# EAGLE board TouScruino-arm-ui2-v0 (EAGLE 6.3)
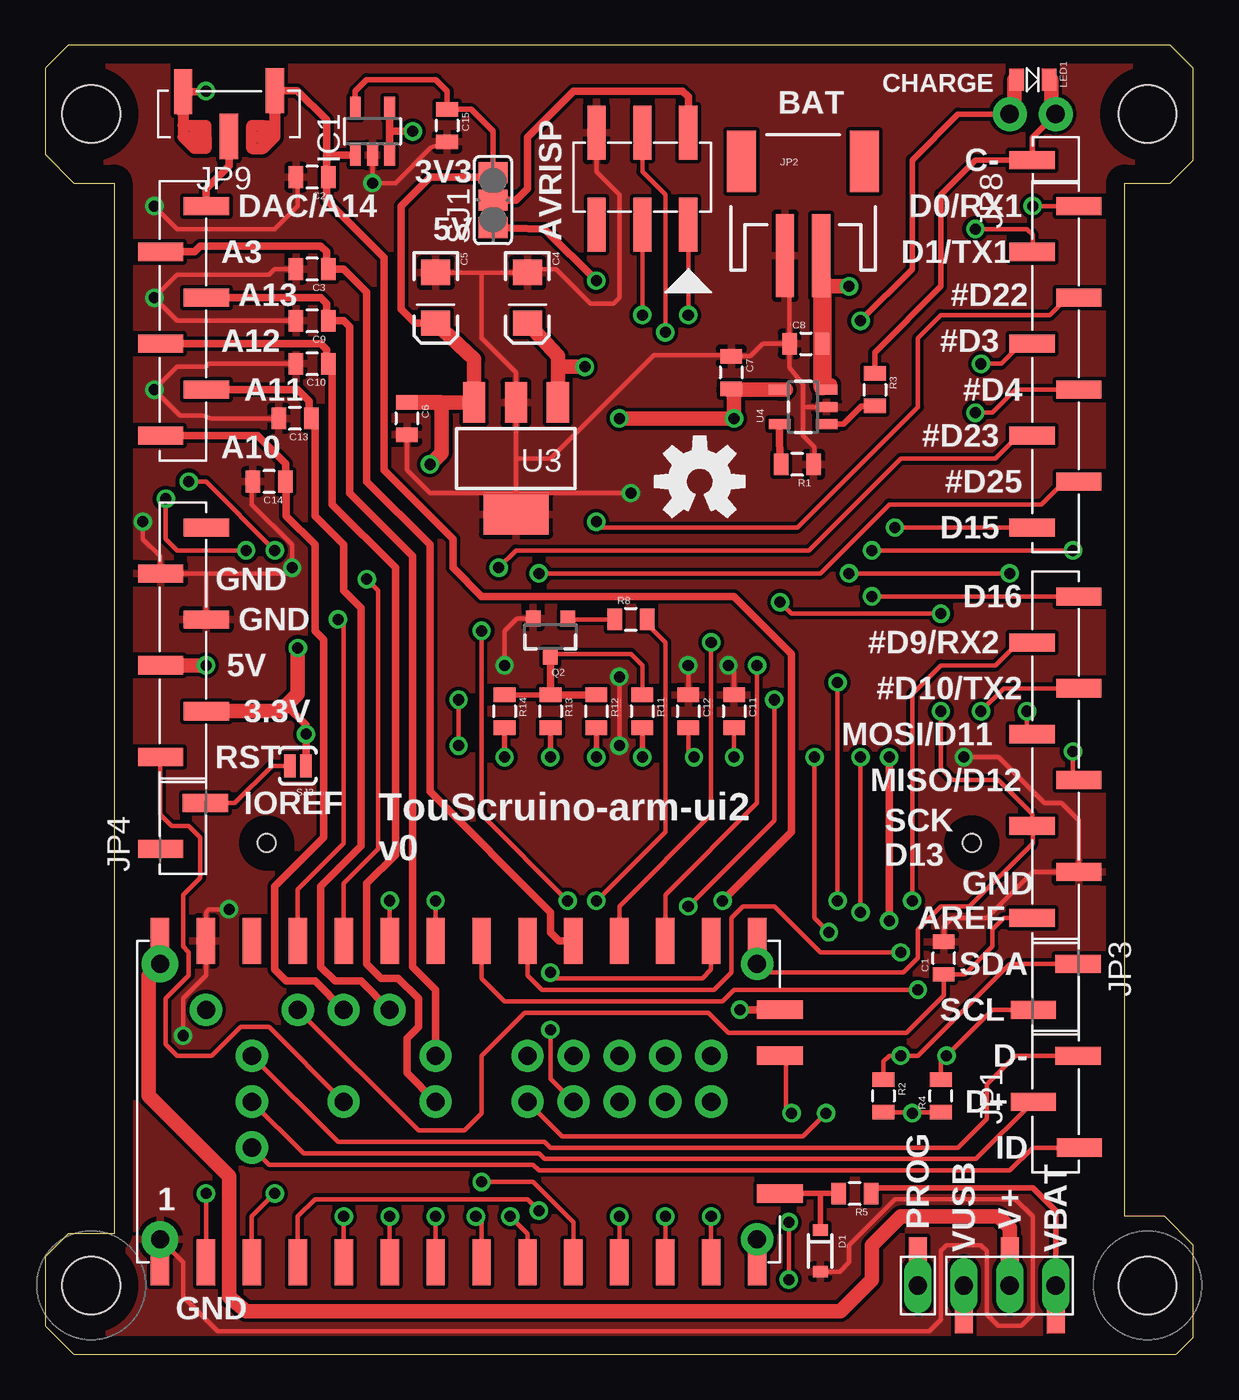
[diagram p0: board, top side]
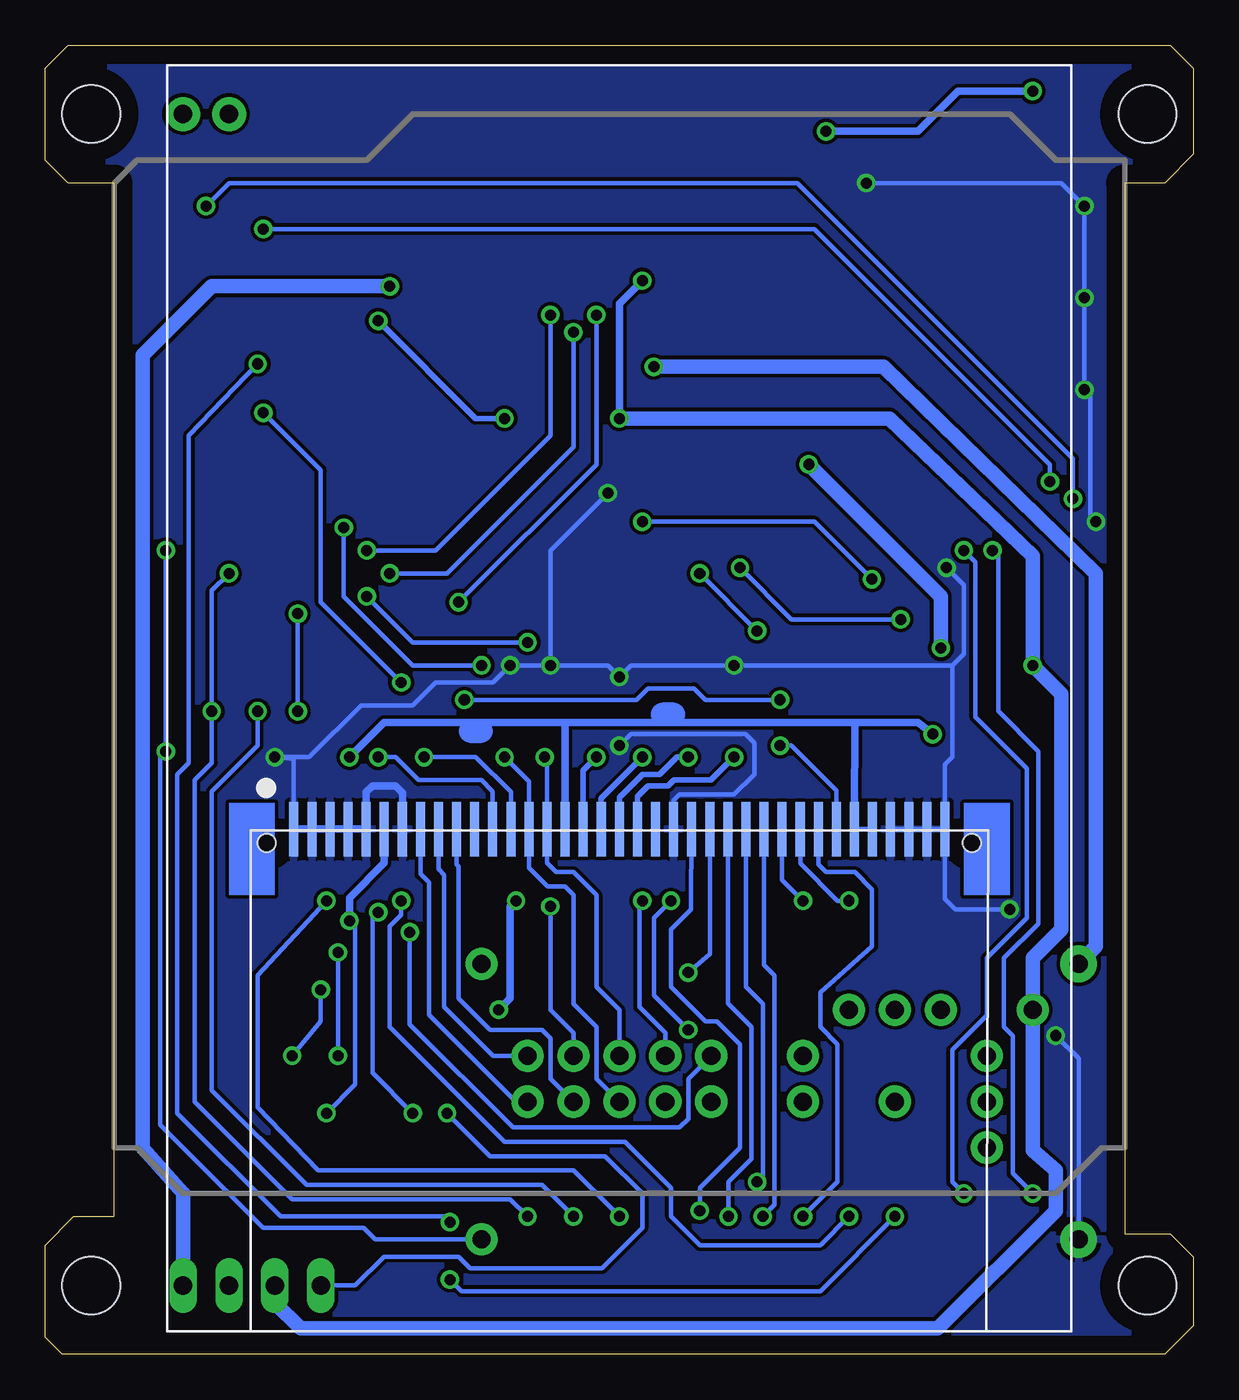
[diagram p1: board, bottom side, seen from below]

Size 63.5 x 72.39 mm. Coordinates in mm from the lower left corner, seen from the top.
Outline: 63.5,0.95 63.5,6.03 61.91,7.62 59.69,7.62 59.69,64.77 62.23,64.77 63.5,66.04 63.5,71.12 62.23,72.39 1.27,72.39 0,71.12 0,66.36 1.59,64.77 1.91,64.77 3.81,64.77 3.81,6.67 1.27,6.67 0,5.4 0,1.59 1.59,0 62.55,0 63.5,0.95
Copper layers (1*16): Top 0.035mm / dielectric 1.5mm / Bottom 0.035mm
Design rules "default *": minimum track width 10mil, minimum drill 24mil, track to track 8mil, track to pad 8mil, pad to pad 8mil, via to via 8mil, smd to smd 8mil, copper to edge 40mil, drill to drill 8mil, minimum pad ring 10mil, minimum via ring 8mil, stop-mask expansion 4mil, vias tented up to drill 0mil, thermal gap 10mil
Net classes: 0 default: width 0.203 mm; 1 vcc: width 0.254 mm; 2 signal: width 0.305 mm
Holes 3.2 mm at 2.54,68.58 60.96,68.58 2.54,3.81 60.96,3.81

## Footprints (pad centres in the part's own frame; a part is rotated, then mirrored left to right if it is on the bottom)
2X3_SMD = smd 3 x 1 bottom: 1 -2.62,2.54; 2 2.46,2.54; 3 -2.62,0; 4 2.46,0; 5 -2.62,-2.54; 6 2.46,-2.54
0805 = smd 0.8 x 1.2: 1 -0.9,0; 2 0.9,0
EIA3216 = smd 1.4 x 1.6: A 1.4,0; C -1.4,0
ILI9325_28INCH_TS = smd 0.5 x 3: 1 -18,27.77; 2 -17,27.77; 3 -16,27.77; 4 -15,27.77; 5 -14,27.77; 6 -13,27.77; 7 -12,27.77; 8 -11,27.77; 9 -10,27.77; 10 -9,27.77; 11 -8,27.77; 12 -7,27.77; 13 -6,27.77; 14 -5,27.77; 15 -4,27.77; 16 -3,27.77; 17 -2,27.77; 18 -1,27.77; 19 0,27.77; 20 1,27.77; 21 2,27.77; 22 3,27.77; 23 4,27.77; 24 5,27.77; 25 6,27.77; 26 7,27.77; 27 8,27.77; 28 9,27.77; 29 10,27.77; 30 11,27.77; 31 12,27.77; 32 13,27.77; 33 14,27.77; 34 15,27.77; 35 16,27.77; 36 17,27.77; 37 18,27.77 | hole 1: -19.5,27; 19.5,27
SOD-323 = smd 0.63 x 0.83: 1 -1.15,0; 2 1.15,0
SOT23-5 = smd 0.6 x 1.2: 1 -0.95,-1.306; 2 0,-1.306; 3 0.95,-1.306; 4 0.95,1.306; 5 -0.95,1.306
1X03_SMD_ALT = smd 1 x 2.5: 1 0,-1.24; 2 -2.54,1.24; 3 -5.08,-1.3
JST-2-SMD = smd 1 x 4.6: 1 -1,-3.7; 2 1,-3.7 | smd 1.6 x 3.4: NC1 -3.4,1.5; NC2 3.4,1.5
1X02_SMD_ALT = smd 1 x 2.5: 1 0,-1.24; 2 -2.54,1.24
1X03_SMD_TH = drill 1.016 pad 1.245 long: 1 0,0; 2 -2.54,0; 3 -5.08,0 | smd 1 x 2: 1A 0,1.651; 2A -2.54,-1.651; 3A -5.08,1.651
1X01_SMD_TH = drill 1.016 pad 1.245 long: 1 0,0 | smd 1 x 2: 1A 0,1.651
ARDUINO_SHIELD_SMD_ALT = smd 1 x 2.5 bottom: 3.3V 27.94,46.97; 5V 25.4,49.5; A0 12.7,49.5; A1 10.16,46.97; A2 7.62,49.5; A3 5.08,46.97; A4 2.54,49.5; A5 0,46.97; AREF 39.37,1.3; D2 5.08,-1.28; D3 7.62,1.3; D4 10.16,-1.28; D5 12.7,1.3; D6 15.24,-1.28; D7 17.78,1.3; D8 21.59,-1.28; D9 24.13,1.3; D10 26.67,-1.28; D11 29.21,1.3; D12 31.75,-1.28; D13 34.29,1.3; GND@0 22.86,46.97; GND@1 20.32,49.5; GND@2 36.83,-1.28; RES 30.48,49.5; RX 0,-1.28; TX 2.54,1.3; VIN 17.78,46.97
1X01_SMD = smd 1 x 2.5: 1 0,1.3
1X03_SMD_SJ = smd 1 x 2.5: 1 2.54,-1.24; 2 0,1.24; 3 -2.54,-1.3
LED = smd 0.8 x 1.2: A -0.9,0; C 0.9,0 | drill 1.016 pad 1.88: A1 -1.27,-1.905; C1 1.27,-1.905
SOT23-3 = smd 0.8 x 0.9: 1 -0.95,-1; 2 0.95,-1; 3 0,1.1
SJ_2WAYS = smd 1.168 x 1.6: 1 -1.524,0; 2 0,0; 3 1.524,0
SJ_2S-NO = smd 0.635 x 1.27: 1 -0.45,0; 2 0.45,0
SOT223 = smd 1.219 x 2.235: 1 -2.311,-3.099; 2 0,-3.099; 3 2.311,-3.099 | smd 3.6 x 2.2: 4 0,3.099
SOT23-5' = smd 0.55 x 1.2: 1 -0.95,-1.3; 2 0,-1.3; 3 0.95,-1.3; 4 0.95,1.3; 5 -0.95,1.3
TEENSY-3.1_HSMD = drill 1 pad 2.032: 1 -7.62,16.51; 28 7.62,16.51 | smd 2.54 x 1.016: 1A -8.89,16.51; 2 -8.89,13.97; 3 -8.89,11.43; 4 -8.89,8.89; 5 -8.89,6.35; 6 -8.89,3.81; 7 -8.89,1.27; 8 -8.89,-1.27; 9 -8.89,-3.81; 10 -8.89,-6.35; 11 -8.89,-8.89; 12 -8.89,-11.43; 13 -8.89,-13.97; 14A -8.89,-16.51; 15A 8.89,-16.51; 16 8.89,-13.97; 17 8.89,-11.43; 18 8.89,-8.89; 19 8.89,-6.35; 20 8.89,-3.81; 21 8.89,-1.27; 22 8.89,1.27; 23 8.89,3.81; 24 8.89,6.35; 25 8.89,8.89; 26 8.89,11.43; 27 8.89,13.97; 28A 8.89,16.51 | drill 1 pad 1.778: 14 -7.62,-16.51; 15 7.62,-16.51; 34 0,1.27; 36 0,-3.81; 37 0,-6.35; 38 0,-8.89; 39 0,-11.43; 40 0,-13.97; 41 2.54,-13.97; 42 2.54,-11.43; 43 2.54,-8.89; 44 2.54,-6.35; 45 2.54,-3.81; 47 2.54,1.27; 48 5.08,13.97; 49 5.08,8.89; 50 5.08,6.35; 51 5.08,3.81; 52 2.54,11.43; 53 0,11.43; 54 -2.54,11.43; 55 0,6.35 | smd 1.016 x 2.54: 29 -5.08,-17.78; 32 2.54,-17.78; 33 5.08,-17.78

## Placement (x,y rotation side)
AVRISP  AVRISP  [2X3_SMD]  33.02,65.09 90 bottom
C1  0.1uF  [0805]  49.69,21.91 90 top
C2  10nF  [0805]  14.76,65.09 180 top
C3  10nF  [0805]  14.76,60.01 180 top
C4  10uF  [EIA3216]  26.67,58.42 270 top
C5  10uF  [EIA3216]  21.59,58.42 270 top
C6  0.1uF  [0805]  20,51.75 270 top
C7  4.7uF  [0805]  37.94,54.29 270 top
C8  4.7uF  [0805]  42.07,55.88 0 top
C9  10nF  [0805]  14.76,57.15 180 top
C10  10nF  [0805]  14.76,54.77 180 top
C11  10nF  [0805]  38.1,35.56 270 top
C12  10nF  [0805]  35.56,35.56 270 top
C13  10nF  [0805]  13.81,51.75 180 top
C14  10nF  [0805]  12.38,48.26 180 top
C15  0.1uF  [0805]  22.23,67.94 270 top
CN1  [ILI9325_28INCH_TS]  31.75,1.27 0 bottom
D1  2V4  [SOD-323]  42.86,5.71 270 top
IC1  LMV321M5  [SOT23-5]  18.1,67.63 0 top
JP1  USB  [1X03_SMD_ALT]  55.88,16.51 90 top
JP2  BAT  [JST-2-SMD]  41.91,64.45 0 top
JP3  I2C  [1X02_SMD_ALT]  55.88,19.05 270 top
JP4  IOREF  [1X02_SMD_ALT]  7.62,30.48 90 top
JP5  SWITCH  [1X03_SMD_TH]  50.8,3.81 180 top
JP6  [1X01_SMD_TH]  48.26,3.81 0 top
JP7  ARDUINO_SHIELDSMD_ALT  [ARDUINO_SHIELD_SMD_ALT]  55.88,63.5 270 bottom
JP8  CHARGE  [1X01_SMD]  55.88,66.04 90 top
JP9  DAC/A14  [1X03_SMD_SJ]  10.16,68.58 180 top
LED1  Amber  [LED]  54.61,70.48 0 top
Q2  MMBT2222A  [SOT23-3]  27.94,39.69 180 top
R1  2K  [0805]  41.59,49.21 180 top
R2  4K7  [0805]  46.35,14.29 270 top
R3  10K  [0805]  45.88,53.34 270 top
R4  4K7  [0805]  49.53,14.29 90 top
R5  100k  [0805]  44.77,8.89 180 top
R8  10K  [0805]  32.38,40.64 0 top
R11  10  [0805]  33.02,35.56 270 top
R12  10  [0805]  30.48,35.56 270 top
R13  10  [0805]  27.94,35.56 270 top
R14  10  [0805]  25.4,35.56 270 top
SJ1  [SJ_2WAYS]  24.77,63.82 90 top
SJ3  [SJ_2S-NO]  13.97,32.54 180 top
U3  MIC5209-3.3YS  [SOT223]  26.04,49.53 180 top
U4  MCP73831  [SOT23-5']  41.91,52.39 90 top
U$3  OSHW-LOGOM  [OSHW-LOGO-M]  36.2,48.26 0 top
U$4  TEENSY-3.1SMD  [TEENSY-3.1_HSMD]  22.86,13.97 90 top
U$5  OSHW-LOGOM  [OSHW-LOGO-M]  36.2,48.26 0 top

## Library data of the parts
AVRISP JP1 JP3-JP9 LED1 SJ1 U3 U$4 = wibauxl
C1-C15 D1 JP2 Q2 R1-R5 R8 R11-R14 SJ3 U4 U$3 U$5 = SparkFun
CN1 = adafruit
IC1 = linear

## Nets
3.3V: C5.A C6.1 C15.1 CN1.6 CN1.16 CN1.32 CN1.33 IC1.5 JP7.3.3V R2.2 R4.1 SJ1.3 SJ3.1 U3.3
A3: C3.1 JP7.A4 U$4.19
A10: C14.1 JP7.A0 U$4.50
A11: C13.1 JP7.A1 U$4.51
A12: C10.1 JP7.A2 U$4.34
A13: C9.1 JP7.A3 U$4.47
A14: C2.1 IC1.1 JP9.3 U$4.33
A14/DAC: JP7.A5 JP9.2
AREF: C1.1 JP7.AREF U$4.49
D0/RX1: JP7.RX U$4.2
D1/TX1: JP7.TX U$4.3
D3#: JP7.D3 U$4.5
D4#: JP7.D4 U$4.6
D9/RX2#: JP7.D9 U$4.11
D10/TX2#: JP7.D10 U$4.12
D11/MOSI: AVRISP.4 JP7.D11 U$4.13
D12/MISO: AVRISP.1 JP7.D12 U$4.14
D13/SCK: AVRISP.3 JP7.D13 U$4.15
D15: JP7.D7 U$4.17
D16: JP7.D8 U$4.18
D18/SDA: JP3.2 R2.1 U$4.20
D19/SCL: JP3.1 R4.2 U$4.21
D22#: JP7.D2 U$4.24
D23#: JP7.D5 U$4.25
D25#: JP7.D6 U$4.37
DAC: IC1.3 IC1.4 JP9.1
GND [vcc]: AVRISP.6 C1.2 C2.2 C3.2 C4.C C5.C C6.2 C7.1 C8.1 C9.2 C10.2 C11.1 C12.1 C13.2 C14.2 C15.2 CN1.1 CN1.2 CN1.3 CN1.4 CN1.5 CN1.7 CN1.22 CN1.34 CN1.35 CN1.36 CN1.37 D1.2 IC1.2 JP2.1 JP7.GND@0 JP7.GND@1 JP7.GND@2 Q2.2 R1.1 U3.2 U3.4 U4.2 U$4.1 U$4.27
IOREF: JP4.1 SJ3.2
L1: CN1.17 R11.2
L2: CN1.18 R12.2
L3: CN1.19 R13.2
L4: CN1.20 R14.2
LCD_BL: R8.2 U$4.44
LCD_CD: CN1.8 U$4.40
LCD_D0: CN1.23 U$4.4
LCD_D1: CN1.24 U$4.16
LCD_D2: CN1.25 U$4.9
LCD_D3: CN1.26 U$4.10
LCD_D4: CN1.27 U$4.8
LCD_D5: CN1.28 U$4.22
LCD_D6: CN1.29 U$4.23
LCD_D7: CN1.30 U$4.7
LCD_RD: CN1.10 U$4.39
LCD_RES: CN1.31 U$4.42
LCD_WR: CN1.9 U$4.41
N$2: AVRISP.2 SJ1.2
N$4: Q2.1 R8.1
N$7: Q2.3 R11.1 R12.1 R13.1 R14.1
N$8: JP8.1 LED1.C1 R3.1
N$12: R3.2 U4.1
N$13: R1.2 U4.5
PROG: JP6.1 U$4.32
RES: JP7.RES U$4.55
TP_X+: CN1.12 U$4.36
TP_X-: C11.2 CN1.14 U$4.38
TP_Y+: CN1.13 U$4.45
TP_Y-: C12.2 CN1.15 U$4.43
USB_DM: JP1.1 U$4.52
USB_DP: JP1.2 U$4.53
USB_ID: JP1.3 U$4.54
V+: C4.A JP5.2 U3.1 U$4.28
VBAT: C8.2 JP2.2 JP5.3 R5.1 U4.3
VBAT-: D1.1 R5.2 U$4.29
VUSB: C7.2 JP5.1 JP7.5V LED1.A1 SJ1.1 U4.4 U$4.48

## Tracks (layer width: path | path; a pad name or v marks a point on that pad's centre or on a via)
3.3V  (via drill 0.61)
  Top 0.254: 48.58,13.39 R4.1 | v47.94,13.34 48.58,13.39 | 48.58,13.39 R2.2
  Top 0.305: IC1.5 17.15,69.85 17.78,70.48 21.59,70.48 22.23,69.85 C15.1 23.55,68.84 24.77,67.63 SJ1.3
  Top 0.406: v46.67,33.02 v46.67,23.97 | SJ3.1 v14.42,34.29 14.42,34.79 13.34,35.88 | C5.A 20.45,57.02 19.68,57.78 19.68,63.5 21.27,65.09 23.88,65.09 SJ1.3
  Top 0.813: JP7.3.3V 13.02,35.56 13.34,35.88 13.97,36.51 v13.97,39.05 | C5.A 23.72,55.03 U3.3 20.03,52.63 C6.1 21.86,52.65 21.91,52.07 21.91,49.85 v21.27,49.21
  Bottom 0.254: v46.67,23.97 46.35,23.65 46.35,14.92 v47.94,13.34 | CN1.32 CN1.33
  Bottom 0.406: CN1.6 44.75,27.16 46.67,25.24 v46.67,23.97 | CN1.16 34.75,34.12 34.77,34.92 | 34.77,34.92 39.69,34.92 | 39.37,34.45 39.69,34.92 | 39.69,34.92 44.77,34.92 v46.67,33.02 | CN1.32 18.75,31.77 18.73,33.02 18.73,34.92 | 18.73,34.92 29.53,34.92 | 29.37,35.4 29.53,34.92 | 29.53,34.92 34.77,34.92 | v14.42,34.29 15.24,34.92 18.73,34.92
  Bottom 0.813: v13.97,39.05 13.97,41.91 v21.27,49.21
  Bottom 1.27: 40.01,34.45 39.37,34.45 | 28.73,35.4 29.37,35.4
A3
  Top 0.406: U$4.19 28.42,22.86 27.94,23.34 27.94,24.45 21.27,31.11 21.27,44.77 17.78,48.26 17.78,58.74 16.51,60.01 C3.1 15.56,60.11 15.56,60.96 15.24,61.28 8.57,61.28 8.26,60.96 JP7.A4
A10
  Top 0.406: U$4.50 14.92,20.64 13.34,20.64 12.7,21.27 12.7,25.88 15.4,28.57 15.4,39.53 14.92,40.01 14.92,44.77 13.34,46.35 13.34,47.57 C14.1 13.28,49.27 11.75,50.8 JP7.A0
A11
  Top 0.254: C13.1 14.92,51.44
  Top 0.305: 8.89,53.32 JP7.A1
  Top 0.406: U$4.51 17.46,20.64 16.03,20.64 15.24,21.43 15.24,25.88 17.46,28.1 17.46,41.27 16.51,42.23 16.51,44.77 14.92,46.35 14.92,51.44 14.92,51.75 | JP7.A1 13.97,53.34 14.61,52.7 14.61,51.86 C13.1
A12
  Top 0.254: C10.1 15.66,54.5
  Top 0.406: U$4.34 20,15.56 20,17.46 20.64,18.1 20.64,19.68 19.53,20.8 18.57,20.8 17.78,21.59 17.78,26.04 19.37,27.62 19.37,43.5 15.88,46.99 15.88,54.29 15.66,54.5 15.56,54.61 | JP7.A2 15.24,55.88 15.56,55.56 15.56,54.98 C10.1
A13
  Top 0.406: U$4.47 21.59,20.16 20.32,21.43 20.32,44.13 16.83,47.62 16.83,56.83 16.51,57.15 C9.1 15.56,57.2 15.56,58.1 15.24,58.42 JP7.A3
A14  (via drill 0.61)
  Top 0.305: 15.56,64.98 C2.1 15.56,65.19 | 15.59,66.32 15.56,66.36
  Top 0.406: U$4.33 v38.42,19.05 | v37.47,25.08 41.27,28.89 41.27,38.73 38.1,41.91 24.13,41.91 22.54,43.5 22.54,45.09 18.73,48.9 18.73,60.64 15.56,63.82 15.56,64.98 | JP9.3 13.94,69.88 15.56,68.26 15.56,66.36 15.56,65.19 | IC1.1 15.59,66.32
  Bottom 0.406: v38.42,19.05 37.78,19.68 37.78,24.77 v37.47,25.08
A14/DAC
  Top 0.406: JP9.2 10.16,65.72 8.89,64.45 8.89,63.52 JP7.A5
AREF
  Top 0.254: 55.24,24.13 JP7.AREF 53.02,24.13 52.39,23.5 52.39,22.54 50.85,21.01 C1.1 49.69,19.84 47.62,17.78 37.78,17.78 36.67,18.89 26.51,18.89 24.13,16.51 24.13,13.34 23.18,12.38 20.64,12.38 U$4.49
D0/RX1  (via drill 0.61)
  Top 0.254: U$4.2 v8.89,8.89 | JP7.RX v54.61,63.5 | v11.11,44.45 7.3,44.45 6.67,45.09 v6.67,47.31
  Bottom 0.254: v8.89,8.89 10,10 10,17.62 10.48,18.1 10.48,21.91 8.57,23.81 8.57,33.34 10.79,35.56 10.79,44.13 v11.11,44.45 | v54.61,63.5 53.34,64.77 21.91,64.77 6.67,49.53 v6.67,47.31
D1/TX1  (via drill 0.61)
  Top 0.254: U$4.3 11.43,7.62 v12.7,8.89 | JP7.TX 54.61,61.91 54.29,62.23 v51.44,62.23 | v12.7,44.45 8.89,48.26 v7.94,48.26
  Bottom 0.254: v12.7,8.89 13.34,9.53 13.34,16.83 11.43,18.73 11.43,21.91 9.21,24.13 9.21,32.38 12.06,35.24 12.06,43.81 v12.7,44.45 | v51.44,62.23 20.95,62.23 7.94,49.21 v7.94,48.26
D3#  (via drill 0.61)
  Top 0.254: U$4.5 v16.51,7.62 | v41.12,4.13 v41.12,7.3 | v51.75,54.77 52.86,54.77 53.82,55.72 54.42,55.72 JP7.D3
  Bottom 0.254: v16.51,7.62 20.64,3.49 40.48,3.49 v41.12,4.13 | v41.12,7.3 41.43,7.62 50.48,7.62 56.2,13.34 56.2,32.07 55.56,32.7 55.56,50.8 v51.75,54.77
D4#  (via drill 0.61)
  Top 0.254: U$4.6 v19.05,7.62 | v43.81,25.08 v43.81,37.15 | v51.44,52.07 52.39,52.07 53.66,53.34 JP7.D4
  Bottom 0.254: v19.05,7.62 20.64,6.03 27.3,6.03 28.89,7.62 28.89,9.21 31.43,11.75 38.1,11.75 44.45,18.1 44.45,23.65 43.81,24.29 v43.81,25.08 | v43.81,37.15 48.26,41.59 48.26,48.9 v51.44,52.07
D9/RX2#  (via drill 0.61)
  Top 0.254: U$4.11 v31.75,7.62 | v47.94,25.08 47.94,36.51 49.53,38.1 52.55,38.1 53.82,39.37 JP7.D9
  Bottom 0.254: v31.75,7.62 34.29,10.16 48.42,10.16 51.75,13.65 51.75,20.95 v47.94,25.08
D10/TX2#  (via drill 0.61)
  Top 0.254: U$4.12 v34.29,7.62 | v51.75,35.56 53.02,36.83 JP7.D10
  Bottom 0.254: v34.29,7.62 36.04,9.37 49.05,9.37 54.29,14.61 54.29,31.11 51.75,33.66 v51.75,35.56
D11/MOSI  (via drill 0.61)
  Top 0.254: U$4.13 v36.83,7.62 | v54.29,35.56 54.29,34.29 54.61,34.26 JP7.D11 | AVRISP.4 33.02,65.41 34.29,64.14 v34.29,56.52 | v53.34,43.18 v44.45,43.18
  Bottom 0.254: v36.83,7.62 37.78,8.57 49.85,8.57 55.24,13.97 55.24,31.75 54.29,32.7 v54.29,35.56 54.29,42.23 v53.34,43.18 | v44.45,43.18 41.27,43.18 34.29,50.16 v34.29,56.52
D12/MISO  (via drill 0.61)
  Top 0.254: v56.83,33.34 56.83,32.08 JP7.D12 | AVRISP.1 v35.56,57.47 | v56.83,44.45 v45.72,44.45
  Bottom 0.254: U$4.14 45.24,6.35 45.88,6.99 51.44,6.99 57.15,12.7 57.15,33.02 v56.83,33.34 v56.83,44.45 | v35.56,57.47 35.56,50.8 41.91,44.45 v45.72,44.45
D13/SCK  (via drill 0.61)
  Top 0.254: U$4.15 39.85,21.11 47.47,21.11 48.26,21.91 48.26,23.5 49.53,24.77 51.12,24.77 54.61,28.26 54.61,29.18 JP7.D13 54.58,29.88 52.7,31.75 50.16,31.75 49.53,32.38 v49.53,35.56 | AVRISP.3 v33.02,57.47 | v49.53,40.96 41.27,40.96 v40.64,41.59
  Bottom 0.254: v33.02,57.47 33.02,49.21 v40.64,41.59 | v49.53,35.56 v49.53,40.96
D15  (via drill 0.61)
  Top 0.254: v39.37,38.1 39.37,30.48 34.29,25.4 U$4.17 | v46.99,45.72 JP7.D7
  Bottom 0.254: v39.37,38.1 43.18,38.1 46.99,41.91 v46.99,45.72
D16  (via drill 0.61)
  Top 0.254: v36.83,39.37 36.83,29.84 31.75,24.77 U$4.18 | v45.72,41.91 JP7.D8
  Bottom 0.254: v36.83,39.37 43.18,39.37 v45.72,41.91
D18/SDA  (via drill 0.61)
  Top 0.254: U$4.20 26.35,21.91 26.35,22.54 U$4.20 | v47.31,22.23 42.86,22.23 40.32,24.77 38.58,24.77 37.94,24.13 37.94,21.11 36.99,20.16 27.46,20.16 26.67,20.95 U$4.20 | R2.1 46.35,16.19 46.67,16.51 v47.31,16.51 48.26,16.51 53.34,21.59 57.15,21.59 57.15,21.56 JP3.2
  Bottom 0.254: v47.31,22.23 v47.31,16.51
D19/SCL  (via drill 0.61)
  Top 0.254: R4.2 49.53,16.19 v49.85,16.51 52.39,19.05 JP3.1 | U$4.21 24.13,20.8 25.4,19.53 37.47,19.53 38.1,20.16 v48.26,20.16
  Bottom 0.254: v49.85,16.51 48.26,18.41 v48.26,20.16
D22#  (via drill 0.61)
  Top 0.254: U$4.24 16.51,26.04 18.41,27.94 18.41,42.23 v17.78,42.86 | v30.48,46.04 30.8,45.72 41.59,45.72 48.26,52.39 48.26,56.2 49.53,57.47 55.56,57.47 56.2,58.1 56.84,58.1 JP7.D2
  Bottom 0.254: v17.78,42.86 20.95,46.04 v30.48,46.04
D23#  (via drill 0.61)
  Top 0.254: U$4.25 13.97,25.72 16.51,28.26 16.51,40.32 v16.19,40.64 | v25.08,43.5 26.04,44.45 42.23,44.45 47.31,49.53 52.55,49.53 53.82,50.8 JP7.D5
  Bottom 0.254: v16.19,40.64 22.23,40.64 v25.08,43.5
D25#  (via drill 0.61)
  Top 0.254: U$4.37 27.94,15.24 v27.94,17.94 | v28.89,25.08 24.13,29.84 v24.13,40.01 | v27.3,43.18 42.86,43.18 46.67,46.99 55.09,46.99 56.36,48.26 JP7.D6
  Bottom 0.254: v27.94,17.94 29.84,19.84 29.84,24.13 v28.89,25.08 | v24.13,40.01 v27.3,43.18
DAC  (via drill 0.61)
  Top 0.305: IC1.4 19.05,68.9 | IC1.3
  Top 0.406: JP9.1 8.86,69.82 v8.89,69.85 | 19.05,68.9 19.05,67.63 | 19.05,67.63 IC1.3 | v20.32,67.63 19.05,67.63
  Bottom 0.406: v8.89,69.85 13.02,69.85 15.24,67.63 v20.32,67.63
GND  (via drill 0.61)
  Top 0.254: v10.16,24.61 9.05,24.61 8.89,24.45 U$4.27 | 8.89,23.5 U$4.27 | v50.8,33.02 52.7,33.02 55.24,30.48 56.2,30.48 57.15,29.53 JP7.GND@2 54.61,26.67 52.07,24.13 50.16,24.13 49.69,23.65 C1.2 | 8.89,43.18 13.34,43.18 v13.65,43.5 13.65,44.77 11.43,46.99 11.43,47.57 C14.2 | 8.89,43.18 JP7.GND@1 6.35,43.21 6.35,44.13 5.4,45.09 v5.4,46.04 | JP7.GND@0 8.91,43.16 8.89,43.18 | C12.1 v35.56,38.1 | Q2.2 26.08,40.69 25.4,40.01 v25.4,38.1 | U4.2 41.91,52.39 | 41.91,52.39 41.91,50.8 42.55,50.16 42.55,49.27 R1.1 | C8.1 41.17,54.56 41.91,53.66 41.91,52.39 | C8.1 41.17,60.34 JP2.1 | C8.1 39.69,55.88 39,55.19 C7.1 37.25,55.24 33.66,55.24 27.94,49.53 26.04,49.53 | 24.13,59.82 C4.C 26.86,60.01 28.26,60.01 30.16,58.1 31.43,58.1 31.75,58.42 31.75,64.14 30.48,65.41 AVRISP.6 | 24.13,59.82 C5.C | 24.13,59.82 24.13,56.2 26.04,54.29 U3.2 26.04,49.53 | C6.2 20,48.9 21.27,47.62 25.64,47.62 | 25.64,47.62 U3.4 26.04,49.53 | 25.64,47.62 v32.38,47.62 | C11.1 38.1,37.78 v37.78,38.1 | v31.75,33.66 v31.75,37.47 | v7.62,17.62 7.62,19.68 8.89,20.95 U$4.27 | C13.2 9.21,51.75 8.73,51.91 7.46,51.91 v6.03,53.34 7.3,54.61 8.89,54.61 9.05,54.77 C10.2 | C9.2 7.3,57.15 v6.03,58.42 7.3,59.69 12.38,59.69 12.7,60.01 C3.2 | v6.03,63.5 7.3,62.23 12.7,62.23 13.97,63.5 13.97,64.98 C2.2 | IC1.2 v18.1,64.77 19.37,64.77 21.32,66.73 C15.2 | U$4.1 7.62,5.08 7.62,3.17 9.53,1.27 48.9,1.27 49.53,1.91 49.53,5.71 49.85,6.03 51.75,6.03 52.07,5.71 52.07,2.22 52.7,1.59 53.98,1.59 54.61,2.22 54.61,7.62 53.66,8.57 46.99,8.57 44.45,6.03 44.45,5.08 43.94,4.57 D1.2
  Bottom 0.254: CN1.37 CN1.36 CN1.35 CN1.34 | CN1.22 28.75,30.62 28.42,30.96 25.4,30.96 24.29,32.07 24.29,33.81 24.77,34.29 31.11,34.29 v31.75,33.66 | CN1.37 13.75,25.18 13.18,24.61 v10.16,24.61 | CN1.1 49.75,32.92 v50.8,33.02 48.9,33.02 46.04,35.88 43.18,35.88 41.91,37.15 38.73,37.15 v37.78,38.1 v35.56,38.1 | CN1.37 13.75,32.6 13.34,33.02 13.34,38.1 | 13.34,38.1 12.7,38.73 12.7,42.55 v13.65,43.5 | v35.56,38.1 32.38,38.1 v31.75,37.47 31.11,38.1 v25.4,38.1 13.34,38.1 | v32.38,47.62 35.56,44.45 v35.56,38.1 | U$4.1 6.35,16.35 v7.62,17.62 | v5.4,46.04 5.71,46.04 5.71,53.02 v6.03,53.34 v6.03,58.42 v6.03,63.5 7.3,64.77 v18.1,64.77
  Bottom 0.406: CN1.7 43.75,31.05 44.13,31.43 45.4,31.43 45.75,31.09 CN1.5 CN1.4 CN1.3 CN1.2 CN1.1
  pour Bottom: 2.54,0 63.5,0 63.5,72.39 2.54,72.39
  pour Top: 0,0 61.28,0 61.28,72.39 0,72.39
IOREF
  Top 0.254: SJ3.2 12.54,32.54 10.48,30.48 JP4.1
L1  (via drill 0.61)
  Top 0.305: v33.02,33.02 R11.2
  Bottom 0.305: CN1.17 33.75,32.29 v33.02,33.02
L2  (via drill 0.61)
  Top 0.305: v30.48,33.02 R12.2
  Bottom 0.305: CN1.18 32.75,30.75 v30.48,33.02
L3  (via drill 0.61)
  Top 0.305: v27.94,33.02 R13.2
  Bottom 0.305: CN1.19 31.75,30.8 30.48,32.07 29.53,32.07 28.57,33.02 v27.94,33.02
L4  (via drill 0.61)
  Top 0.305: v25.4,33.02 R14.2
  Bottom 0.305: CN1.20 30.75,30.84 30.16,31.43 29.05,31.43 28.73,31.75 26.67,31.75 v25.4,33.02
LCD_BL  (via drill 0.61)
  Top 0.254: v30.48,25.08 34.29,28.89 34.29,39.37 33.34,40.32 R8.2
  Bottom 0.254: U$4.44 29.21,17.78 30.64,19.21 30.64,25.24 v30.48,25.08
LCD_CD
  Bottom 0.254: CN1.8 42.75,26.56 42.27,26.08 42.27,18.78 37.47,13.97 U$4.40
LCD_D0  (via drill 0.61)
  Top 0.254: v27.3,7.94 26.67,8.57 14.92,8.57 13.97,7.62 U$4.4
  Bottom 0.254: CN1.23 27.78,24.61 28.89,23.5 28.89,20.32 26.99,18.41 26.35,18.41 25.08,17.14 25.08,11.43 27.3,9.21 v27.3,7.94
LCD_D1  (via drill 0.61)
  Top 0.254: v27.94,21.11 28.26,20.8 36.35,20.8 36.83,21.27 U$4.16
  Bottom 0.254: CN1.24 26.75,22.15 v27.94,21.11
LCD_D2  (via drill 0.61)
  Top 0.254: v25.72,7.62 26.67,6.67 26.67,5.71 26.99,5.71 26.99,5.4 U$4.9
  Bottom 0.254: CN1.25 25.75,19.4 24.45,18.1 24.45,10.79 25.72,9.53 v25.72,7.62
LCD_D3  (via drill 0.61)
  Top 0.254: v24.13,9.53 26.99,9.53 29.21,7.3 U$4.10
  Bottom 0.254: CN1.26 24.75,20.3 23.81,19.37 23.81,9.84 v24.13,9.53
LCD_D4  (via drill 0.61)
  Top 0.254: v23.81,7.62 24.13,7.3 U$4.8
  Bottom 0.254: CN1.27 23.75,21.53 23.18,20.95 23.18,8.26 v23.81,7.62
LCD_D5  (via drill 0.61)
  Top 0.254: v21.59,25.08 U$4.22
  Bottom 0.254: CN1.28 22.75,26.24 v21.59,25.08
LCD_D6  (via drill 0.61)
  Top 0.254: U$4.23 19.05,24.92 v19.05,25.08
  Bottom 0.254: CN1.29 21.75,27.3 21.75,27.15 19.68,25.08 v19.05,25.08
LCD_D7  (via drill 0.61)
  Top 0.254: v21.59,7.62 U$4.7
  Bottom 0.254: CN1.30 20.75,27.1 20.32,26.67 18.73,26.67 17.78,25.72 17.78,22.54 20.64,20 20.64,18.1 19.68,17.14 19.68,9.53 v21.59,7.62
LCD_RD
  Bottom 0.254: CN1.10 40.75,27.1 40.64,26.99 40.64,19.68 38.89,17.94 36.04,17.94 35.56,17.46 35.56,15.24 U$4.39
LCD_RES  (via drill 0.61)
  Top 0.254: v22.86,33.66 v22.86,36.2 | v35.56,24.77 40.32,29.53 v40.32,36.2
  Bottom 0.254: CN1.31 19.75,31.18 22.23,33.66 v22.86,33.66 | U$4.42 34.29,17.78 35.56,19.05 v35.56,24.77 | v40.32,36.2 30.8,36.2 30.16,36.83 27.62,36.83 26.99,36.2 v22.86,36.2
LCD_WR
  Bottom 0.254: CN1.9 41.75,26.83 41.43,26.51 41.43,19.21 38.73,16.51 U$4.41
N$2
  Top 0.406: SJ1.2 26.04,63.82 26.67,64.45 26.67,67.31 29.21,69.85 35.24,69.85 35.56,69.53 AVRISP.2
N$4
  Top 0.254: R8.1 31.53,40.59 31.53,40.86 31.75,40.64 28.89,40.64 Q2.1
N$7
  Top 0.254: R12.1 27.99,36.46 27.94,36.51 | R11.1 33.02,38.1 32.38,38.73 28.09,38.73 Q2.3
  Top 0.305: R13.1 R14.1
  Top 0.406: 27.94,36.51 Q2.3 | R12.1 R13.1
N$8
  Top 0.305: R3.1 45.88,55.4 49.53,59.05 49.53,64.14 51.44,66.04 JP8.1 54.58,67.28 LED1.C1
N$12
  Top 0.254: U4.1
  Top 0.305: R3.2 45.14,52.44 44.13,51.44 U4.1
N$13
  Top 0.406: U4.5 40.61,50.83 40.64,49.53 40.64,49.27 R1.2
PROG  (via drill 0.61)
  Top 0.254: U$4.32 40.96,16.51 40.96,13.65 v41.27,13.34
  Bottom 0.254: v41.27,13.34 38.89,10.95 32.54,10.95 30.48,8.89 30.48,6.99 32.7,4.76 40.01,4.76 40.64,5.4 44.77,5.4 46.35,3.81 JP6.1
RES
  Top 0.254: U$4.55 12.38,18.1 10.79,18.1 9.21,16.51 7.3,16.51 6.67,17.14 6.67,19.68 7.94,20.95 7.94,22.23 7.62,22.54 7.62,25.4 8.57,26.35 8.57,28.57 7.94,29.21 6.99,29.21 6.35,29.84 6.35,32.99 JP7.RES
TP_X+  (via drill 0.61)
  Top 0.254: v43.18,13.34 41.91,12.06 28.57,12.06 U$4.36 | v45.09,24.45 v45.09,33.02
  Bottom 0.254: v45.09,24.45 45.4,24.13 45.4,15.56 v43.18,13.34 | CN1.12 38.75,31.13 39.37,31.75 42.86,31.75 44.13,33.02 v45.09,33.02
TP_X-  (via drill 0.61)
  Top 0.254: v38.1,33.02 C11.2
  Bottom 0.254: v38.1,33.02 36.75,31.67 CN1.14 36.75,26.91 35.72,25.88 34.77,25.88 34.29,25.4 34.29,19.37 33.02,18.1 33.02,15.24 U$4.38
TP_Y+  (via drill 0.61)
  Top 0.254: v43.34,23.34 42.55,24.13 v42.55,33.02
  Bottom 0.254: CN1.13 37.75,31.08 39.69,33.02 v42.55,33.02 | U$4.45 27.94,15.24 27.94,13.02 28.42,12.54 37.62,12.54 43.34,18.26 v43.34,23.34
TP_Y-  (via drill 0.61)
  Top 0.254: v35.88,33.02 35.56,33.34 C12.2
  Bottom 0.254: v35.88,33.02 35.75,32.51 CN1.15 35.75,27.18 35.24,26.67 34.29,26.67 33.02,25.4 33.02,20.32 31.75,19.05 U$4.43
USB_DM
  Top 0.254: U$4.52 16.19,11.75 27.62,11.75 27.94,11.43 50.48,11.43 52.07,13.02 52.07,14.92 53.66,16.51 JP1.1
USB_DP
  Top 0.254: U$4.53 14.29,11.11 27.3,11.11 27.62,10.79 51.47,10.79 JP1.2
USB_ID
  Top 0.254: U$4.54 12.38,10.48 26.99,10.48 27.3,10.16 53.34,10.16 54.61,11.43 JP1.3
V+  (via drill 0.61)
  Top 0.813: U$4.28 5.71,20.95 5.71,14.29 10.16,9.84 10.16,3.17 11.11,2.38 43.97,2.38 45.72,4.13 45.72,6.03 47.31,7.62 52.7,7.62 53.34,6.99 JP5.2 | U3.1 28.35,54.61 | 28.35,54.61 28.35,55.2 C4.A | v29.84,54.61 28.35,54.61
  Bottom 0.813: U$4.28 5.4,22.54 5.4,43.18 17.14,54.61 v29.84,54.61
VBAT  (via drill 0.61)
  Top 0.254: 43.5,53.66 43.5,53.62 U4.3
  Top 0.305: JP5.3 55.88,7.94 54.61,9.21 45.72,9.21 45.56,8.73 R5.1
  Top 0.61: 42.86,53.66 43.5,53.66
  Top 0.813: v44.45,59.05 42.86,59.05 42.86,59.69 | 42.86,59.69 42.86,60.7 JP2.2 | 42.97,53.55 42.86,53.66 | 42.97,59.32 42.86,59.69
  Top 1.016: 42.97,53.55 C8.2 42.97,59.32
  Bottom 0.813: JP5.3 55.88,8.89 58.1,11.43 58.1,55.24 54.29,59.05 v44.45,59.05
VBAT-
  Top 0.305: 40.76,8.77 U$4.29 42.86,8.89 | R5.2 42.86,8.89 | D1.1 42.86,8.89
VUSB  (via drill 0.61)
  Top 0.254: 40.96,53.34 38.1,53.34
  Top 0.305: v45.09,57.15 47.94,60.01 47.94,66.04 50.48,68.58 LED1.A1
  Top 0.406: SJ1.1 27.62,62.23 v30.48,59.37
  Top 0.813: v8.89,38.1 JP7.5V | C7.2 37.73,53.34 U4.4 40.95,53.34 40.96,53.34 | 38.1,53.34 v38.1,51.75 v31.75,51.75
  Bottom 0.305: v38.1,51.75 39.69,51.75 v45.09,57.15
  Bottom 0.406: v30.48,59.37 31.75,58.1 v31.75,51.75
  Bottom 0.813: JP5.1 50.8,2.86 49.37,1.43 14.13,1.43 7.62,7.94 7.62,10.16 8.89,11.27 U$4.48 8.89,21.91 7.3,23.5 7.3,36.51 v8.89,38.1 8.89,44.13 16.83,51.75 v31.75,51.75

## Text on the board
tPlace: CHARGE | BAT | C- | 3V3 | D0/RX1 | DAC/A14 | 5V | D1/TX1 | A3 | #D22 | A13 | #D3 | A12 | #D4 | A11 | #D23 | A10 | #D25 | D15 | D16 | GND | GND | #D9/RX2 | 5V | #D10/TX2 | 3.3V | MOSI/D11 | RST | MISO/D12 | IOREF | TouScruino-arm-ui2 | v0 | SCK / D13 | GND | AREF | SDA | SCL | D- | D+ | ID | 1 | PROG | V+ | VUSB | VBAT | GND